# EAGLE board LPEM (EAGLE 5.06)
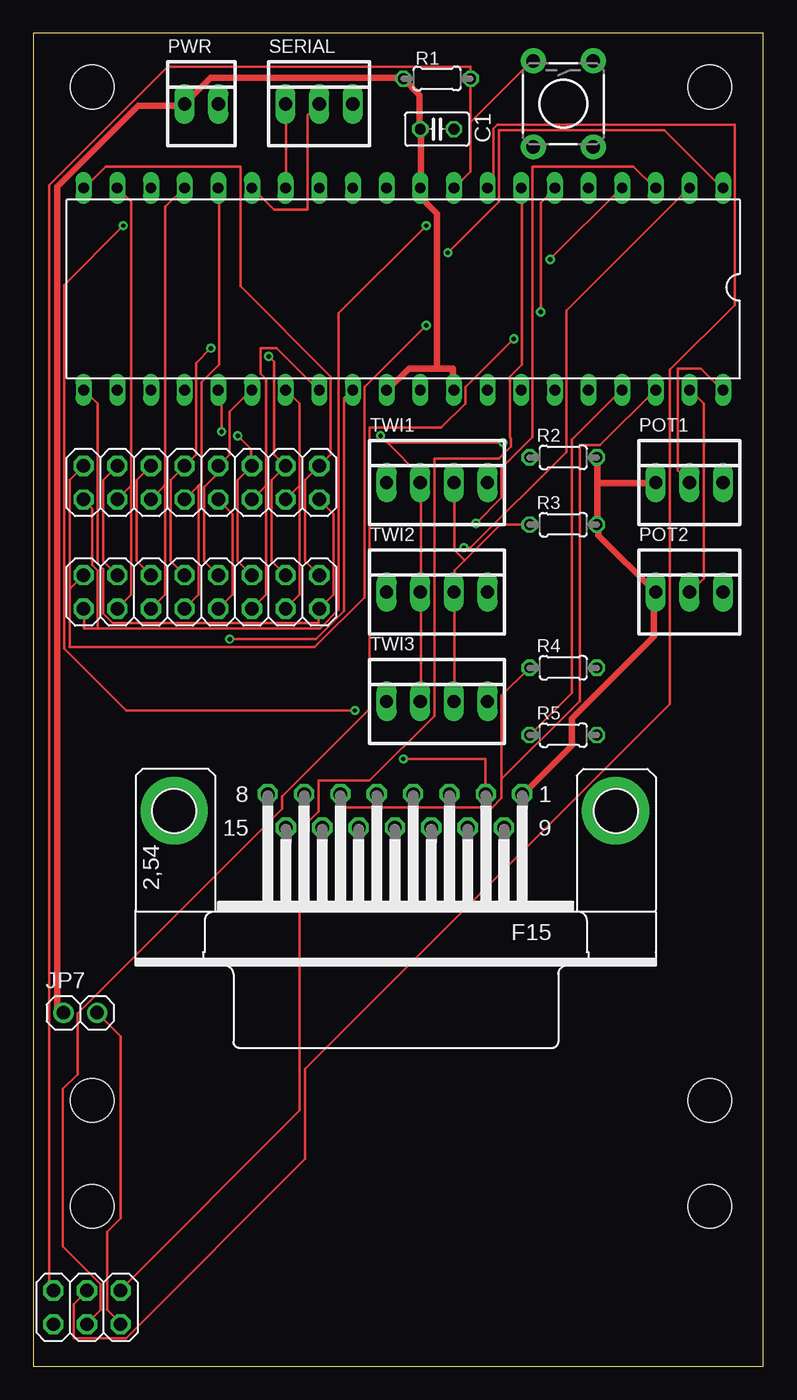
[diagram p0: board, top side]
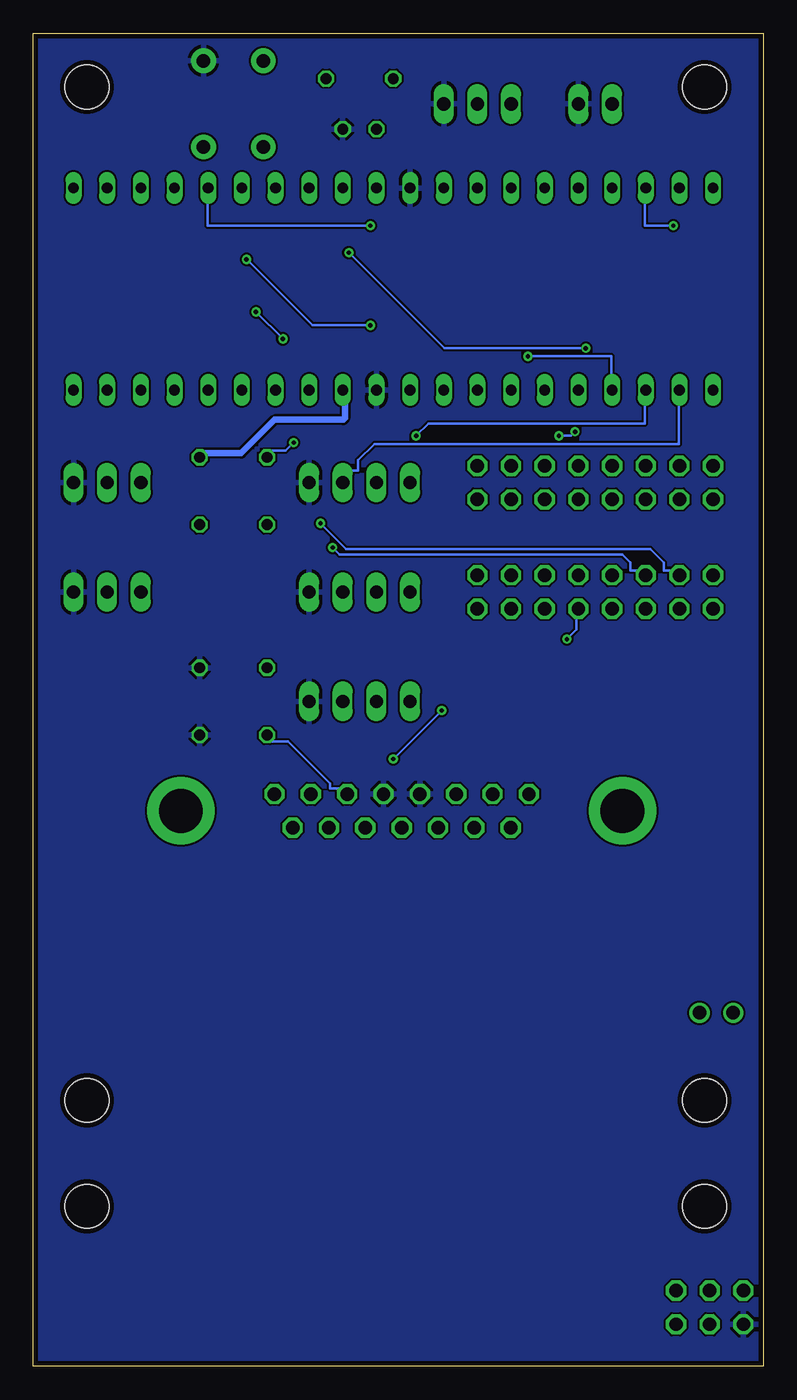
[diagram p1: board, bottom side, seen from below]

Size 55.12 x 100.58 mm. Coordinates in mm from the lower left corner, seen from the top.
Outline: 0,0 55.12,0 55.12,100.58 0,100.58 0,0
Copper layers (1*16): Top 0.0356mm / dielectric 1.5011mm / Bottom 0.0356mm
Design rules "DorkbotPDX *": minimum track width 6mil, minimum drill 13mil, track to track 6mil, track to pad 6mil, pad to pad 6mil, via to via 6mil, smd to smd 6mil, copper to edge 15mil, drill to drill 6mil, minimum pad ring 7mil, minimum via ring 7mil, stop-mask expansion 4mil, vias tented up to drill 0mil, thermal gap 10mil
Net classes: 0 default: width 0.178 mm; 1 pwr: width 0.508 mm
tRestrict: area -1.3,98 to 6.3,101.9; area -1,94.2 to 2.3,98

## Footprints (pad centres in the part's own frame; a part is rotated, then mirrored left to right if it is on the bottom)
C025-025X050 = drill 0.813 octagon: 1 -1.27,0; 2 1.27,0
DIL40 = drill 0.813 long: 1 -24.13,-7.62; 2 -21.59,-7.62; 3 -19.05,-7.62; 4 -16.51,-7.62; 5 -13.97,-7.62; 6 -11.43,-7.62; 7 -8.89,-7.62; 8 -6.35,-7.62; 9 -3.81,-7.62; 10 -1.27,-7.62; 11 1.27,-7.62; 12 3.81,-7.62; 13 6.35,-7.62; 14 8.89,-7.62; 15 11.43,-7.62; 16 13.97,-7.62; 17 16.51,-7.62; 18 19.05,-7.62; 19 21.59,-7.62; 20 24.13,-7.62; 21 24.13,7.62; 22 21.59,7.62; 23 19.05,7.62; 24 16.51,7.62; 25 13.97,7.62; 26 11.43,7.62; 27 8.89,7.62; 28 6.35,7.62; 29 3.81,7.62; 30 1.27,7.62; 31 -1.27,7.62; 32 -3.81,7.62; 33 -6.35,7.62; 34 -8.89,7.62; 35 -11.43,7.62; 36 -13.97,7.62; 37 -16.51,7.62; 38 -19.05,7.62; 39 -21.59,7.62; 40 -24.13,7.62
STAND-OFF = hole 3.302: 0,0
2X08 = drill 1.016 octagon: 1 -8.89,-1.27; 2 -8.89,1.27; 3 -6.35,-1.27; 4 -6.35,1.27; 5 -3.81,-1.27; 6 -3.81,1.27; 7 -1.27,-1.27; 8 -1.27,1.27; 9 1.27,-1.27; 10 1.27,1.27; 11 3.81,-1.27; 12 3.81,1.27; 13 6.35,-1.27; 14 6.35,1.27; 15 8.89,-1.27; 16 8.89,1.27
1X02 = drill 1.016 round: 1 -1.27,0; 2 1.27,0
2X03 = drill 1.016 octagon: 1 -2.54,-1.27; 2 -2.54,1.27; 3 0,-1.27; 4 0,1.27; 5 2.54,-1.27; 6 2.54,1.27
22-23-2031 = drill 1 long: 1 -2.54,0; 2 0,0; 3 2.54,0
22-23-2021 = drill 1 long: 1 -1.27,0; 2 1.27,0
0204/5 = drill 0.813 octagon: 1 -2.54,0; 2 2.54,0
TACTILE-PTH = drill 1.016 pad 1.88 round: 1 -3.251,2.261; 2 3.251,2.261; 3 -3.251,-2.261; 4 3.251,-2.261
22-23-2041 = drill 1 long: 1 -3.81,0; 2 -1.27,0; 3 1.27,0; 4 3.81,0
F15HP = drill 1.016 octagon: 1 -9.601,-1.27; 2 -6.858,-1.27; 3 -4.115,-1.27; 4 -1.372,-1.27; 5 1.372,-1.27; 6 4.115,-1.27; 7 6.858,-1.27; 8 9.601,-1.27; 9 -8.23,1.27; 10 -5.486,1.27; 11 -2.743,1.27; 12 0,1.27; 13 2.743,1.27; 14 5.486,1.27; 15 8.23,1.27 | drill 3.302 pad 5.08 round: G1 -16.662,0; G2 16.662,0

## Placement (x,y rotation side)
C1  [C025-025X050]  30.48,93.34 0 top
IC1  [DIL40]  27.94,81.28 180 top
JP1  STAND-OFF  [STAND-OFF]  4.45,96.52 0 top
JP2  STAND-OFF  [STAND-OFF]  51.05,96.52 0 top
JP3  EPB1  [2X08]  12.7,66.67 180 top
JP4  EPB2  [2X08]  12.7,58.42 180 top
JP5  STAND-OFF  [STAND-OFF]  4.45,20.07 0 top
JP6  STAND-OFF  [STAND-OFF]  51.05,20.07 0 top
JP7  PWRSEL  [1X02]  3.56,26.67 0 top
JP8  STAND-OFF  [STAND-OFF]  4.45,12.07 0 top
JP9  STAND-OFF  [STAND-OFF]  51.05,12.07 0 top
JP10  PROG  [2X03]  4.06,4.45 180 top
POT1  22-23-2031  [22-23-2031]  49.53,66.67 0 top
POT2  22-23-2031  [22-23-2031]  49.53,58.42 0 top
PWR  22-23-2021  [22-23-2021]  12.7,95.25 0 top
R1  47k  [0204/5]  30.48,97.16 180 top
R2  2k  [0204/5]  40.01,68.58 0 top
R3  2k  [0204/5]  40.01,63.5 0 top
R4  37k  [0204/5]  40.01,52.7 0 top
R5  37k  [0204/5]  40.01,47.62 0 top
S1  RESET  [TACTILE-PTH]  40.01,95.25 270 top
SERIAL  22-23-2031  [22-23-2031]  21.59,95.25 0 top
TWI1  22-23-2041  [22-23-2041]  30.48,66.67 0 top
TWI2  22-23-2041  [22-23-2041]  30.48,58.42 0 top
TWI3  22-23-2041  [22-23-2041]  30.48,50.16 0 top
X1  [F15HP]  27.3,41.91 180 top

## Library data of the parts
C1 R1-R5 = rcl
IC1 = 1284p
JP1 JP2 JP5 JP6 JP8 JP9 S1 = SparkFun
JP3 JP4 JP7 JP10 = pinhead
POT1 POT2 PWR SERIAL TWI1-TWI3 = con-molex
X1 = con-subd

## Nets
BOARDSEL0: IC1.24 JP3.3 JP4.3
BOARDSEL1: IC1.25 JP3.5 JP4.5
BOARDSEL2: IC1.26 JP3.7 JP4.7
DATA: IC1.20 JP3.1 JP4.1
DIGSEL0: IC1.16 JP3.10 JP4.10
DIGSEL1: IC1.17 JP3.12 JP4.12
DIGSEL2: IC1.19 JP3.14 JP4.14
GND: C1.2 IC1.11 IC1.31 JP10.6 POT1.3 POT2.3 PWR.2 R4.2 R5.2 S1.1 SERIAL.3 TWI1.4 TWI2.4 TWI3.4 X1.4 X1.5
INPUT0: IC1.1 JP3.9 JP4.9
INPUT1: IC1.2 JP3.11 JP4.11
INPUT2: IC1.3 JP3.13 JP4.13
INPUT3: IC1.4 JP3.15 JP4.15
JOYTRIG: IC1.18 X1.2
MISO: IC1.7 JP10.1
MOSI: IC1.6 JP10.4
N$1: IC1.40 POT1.2
N$2: IC1.39 POT2.2
N$3: IC1.37 R5.1 X1.3
N$4: JP7.2 JP10.2
N$6: IC1.38 R4.1 X1.6
RESET: IC1.9 JP10.5 R1.1 S1.3
RX: IC1.14 SERIAL.1
SCK: IC1.8 JP10.3
SCL: IC1.22 R3.1 TWI1.3 TWI2.3 TWI3.3
SDA: IC1.23 R2.1 TWI1.2 TWI2.2 TWI3.2
SEGSEL0: IC1.27 JP3.4 JP4.4
SEGSEL1: IC1.28 JP3.6 JP4.6
SEGSEL2: IC1.29 JP3.8 JP4.8
SPARE: IC1.5 JP3.16 JP4.16
STROBE: IC1.21 JP3.2 JP4.2
TX: IC1.15 SERIAL.2
VCC [pwr]: C1.1 IC1.10 IC1.30 IC1.32 JP7.1 POT1.1 POT2.1 PWR.1 R1.2 R2.2 R3.2 X1.1

## Tracks (layer width: path | path; a pad name or v marks a point on that pad's centre or on a via)
BOARDSEL0  (via drill 0.33)
  Top 0.178: v17.78,76.2 18.19,75.79 18.19,68.78 19,67.97 JP3.3 19,67.87 17.98,66.85 17.98,60.76 19,59.74 JP4.3
  Bottom 0.178: v17.78,76.2 11.48,76.2 11.48,73.66 IC1.24
BOARDSEL1  (via drill 0.33)
  Top 0.178: v14.22,70.51 14.22,73.46 14.02,73.66 IC1.25 | v15.44,70.21 16.46,69.19 16.46,67.97 JP3.5 16.46,67.87 15.44,66.85 15.44,60.76 16.46,59.74 JP4.5
  Bottom 0.178: v14.22,70.51 14.53,70.21 v15.44,70.21
BOARDSEL2
  Top 0.178: IC1.26 16.46,73.66 14.83,72.03 14.83,68.78 14.02,67.97 JP3.7 13.92,67.87 13.92,67.36 12.9,66.34 12.9,60.76 13.92,59.74 JP4.7
DATA
  Top 0.178: IC1.20 3.86,88.9 5.49,90.53 15.65,90.53 15.65,81.48 22.45,74.68 22.45,68.78 21.64,67.97 JP3.1 21.54,67.87 20.52,66.85 20.52,60.76 21.54,59.74 JP4.1
DIGSEL0
  Top 0.178: 12.45,66.4 11.48,65.43 JP3.10 | 12.45,66.4 12.7,66.65 12.7,74.27 14.02,75.59 14.02,88.9 IC1.16 | JP4.10 11.48,57.2 12.5,58.22 12.5,66.34 12.45,66.4
DIGSEL1
  Top 0.178: 9.91,66.4 8.94,65.43 JP3.12 | 9.91,66.4 9.96,66.45 9.96,87.48 11.38,88.9 IC1.17 | JP4.12 8.94,57.2 9.96,58.22 9.96,66.34 9.91,66.4
DIGSEL2
  Top 0.178: 7.37,66.4 6.4,65.43 JP3.14 | 7.37,66.4 7.42,66.45 7.42,87.88 6.4,88.9 IC1.19 | JP4.14 6.4,57.2 7.42,58.22 7.42,66.34 7.37,66.4
GND
  pour Bottom: 0,101.6 55.88,101.6 55.88,-1.27 0,-1.27
INPUT0  (via drill 0.33)
  Top 0.178: v31.29,84.02 35.15,87.88 35.15,93.27 47.65,93.27 52.02,88.9 IC1.1 | v13.41,76.81 12.29,75.69 12.29,68.78 11.48,67.97 JP3.9 11.38,67.87 10.36,66.85 10.36,60.76 11.38,59.74 JP4.9
  Bottom 0.178: v31.29,84.02 24.08,76.81 v13.41,76.81
INPUT1  (via drill 0.33)
  Top 0.178: v32.51,61.77 33.02,61.77 40.23,68.99 40.23,79.65 49.48,88.9 IC1.2 | JP3.11 8.84,67.87 7.82,66.85 7.82,60.76 8.84,59.74 JP4.11
  Bottom 0.178: v32.51,61.77 32,61.27 10.67,61.27 10.06,60.65 10.06,60.05 9.25,60.05 8.94,59.74 JP4.11
INPUT2  (via drill 0.33)
  Top 0.178: v33.43,63.6 35.36,65.53 35.36,67.77 37.69,70.1 37.69,90.53 45.31,90.53 46.94,88.9 IC1.3 | JP3.13 6.3,67.87 5.28,66.85 5.28,60.76 6.3,59.74 JP4.13
  Bottom 0.178: v33.43,63.6 31.5,61.67 8.53,61.67 7.52,60.65 7.52,60.05 6.71,60.05 6.4,59.74 JP4.13
INPUT3  (via drill 0.33)
  Top 0.178: v39.01,83.52 44.4,88.9 IC1.4 | v29.67,78.54 24.99,73.86 24.99,58.01 21.23,54.25 2.74,54.25 2.74,58.62 2.79,58.67 | 2.79,58.67 3.76,59.64 JP4.15 | JP3.15 3.76,67.87 2.74,66.85 2.74,58.72 2.79,58.67
  Bottom 0.178: v39.01,83.52 34.04,78.54 v29.67,78.54
JOYTRIG  (via drill 0.33)
  Top 0.178: v6.81,86.06 2.34,81.59 2.34,54.15 7.01,49.48 v24.28,49.48 | v27.94,45.82 34.14,45.82 34.14,43.18 X1.2
  Bottom 0.178: v6.81,86.06 8.94,86.06 8.94,88.9 IC1.18 | v24.28,49.48 v27.94,45.82
MISO
  Top 0.178: IC1.7 36.88,88.9 36.88,75.59 35.97,74.68 35.97,70.1 36.07,70 36.07,69.39 35.15,68.48 30.28,68.48 30.28,49.07 25.4,44.2 21.54,44.2 21.54,41.86 20.12,40.44 20.12,19.3 6.6,5.79 JP10.1
MOSI  (via drill 0.33)
  Top 0.178: v38.3,79.55 38.3,87.78 39.42,88.9 IC1.6 | v36.27,77.52 32.61,73.86 32.61,72.64 30.79,70.81 25.4,70.81 25.4,49.58 18.8,42.98 18.8,42.06 3.35,26.62 3.35,22.05 2.23,20.93 2.23,9.04 5.08,6.2 5.08,4.27 4.06,3.25 JP10.4
  Bottom 0.178: v36.27,77.52 v38.3,79.55
N$1
  Top 0.178: IC1.40 52.02,73.66 50.39,75.29 48.67,75.29 48.67,67.56 49.48,66.75 POT1.2
N$2
  Top 0.178: IC1.39 49.58,73.66 50.6,72.64 50.6,59.44 49.58,58.42 POT2.2
N$3
  Top 0.178: IC1.37 44.4,73.66 40.64,69.9 40.64,50.8 37.49,47.65 R5.1
  Bottom 0.178: R5.1 37.39,47.55 37.39,47.14 35.87,47.14 32.72,43.99 32.72,43.59 31.9,43.59 31.5,43.18 X1.3
N$4
  Top 0.178: JP10.2 6.6,3.25 5.59,4.27 5.59,10.16 6.6,11.18 6.6,24.89 4.88,26.62 JP7.2
N$6
  Top 0.178: 35.36,44.3 35.36,42.88 34.65,42.16 23.27,42.16 23.27,43.18 X1.6 | 35.36,44.3 35.36,50.6 37.39,52.63 R4.1 | 35.36,44.3 41.25,50.19 41.25,69.49 42.77,69.49 46.94,73.66 IC1.38
RESET
  Top 0.178: 33.02,93.88 33.02,90.12 31.8,88.9 IC1.9 | 33.02,93.88 33.02,97.13 R1.1 33.02,97.23 33.02,98.04 10.16,98.04 1.22,89.1 1.22,6.1 1.52,5.79 JP10.5 | 33.02,93.88 37.69,98.55 S1.3
RX
  Top 0.178: IC1.14 19.1,88.9 19.1,95.2 SERIAL.1
SCK
  Top 0.178: IC1.8 34.34,88.9 34.75,89.31 34.75,93.37 35.05,93.68 52.93,93.68 52.93,80.06 48.06,75.18 48.06,49.99 20.52,22.45 20.52,15.65 7.01,2.13 3.05,2.13 3.05,4.67 4.06,5.69 JP10.3
SCL
  Top 0.178: 32.56,60.81 31.8,60.05 31.8,58.42 | 32.56,60.81 35.26,63.5 37.39,63.5 R3.1 | 31.8,58.42 TWI2.3 31.8,58.42 | 31.8,58.42 31.8,50.19 TWI3.3 | 32.56,60.81 32.51,60.86 31.8,61.57 31.8,66.65 TWI1.3
  Bottom 0.178: IC1.22 6.4,73.66 6.4,69.6 29.36,69.6 30.58,68.38 30.58,67.56 31.09,67.56 31.7,66.95 31.7,66.75 TWI1.3
SDA  (via drill 0.33)
  Top 0.178: 29.26,58.42 29.26,50.19 TWI3.2 | 29.26,58.42 TWI2.2 29.26,58.42 | 26.77,69.65 29.16,67.26 29.16,66.75 TWI1.2 29.26,66.65 29.26,58.42 | 26.77,69.65 v26.21,70.21 | v35.46,69.7 26.82,69.7 26.77,69.65
  Bottom 0.178: v26.21,70.21 25.3,71.12 8.94,71.12 8.94,73.66 IC1.23 | v35.46,69.7 36.07,69.09 37.39,69.09 37.39,68.58 R2.1
SEGSEL0
  Top 0.178: 20.07,66.4 19.1,65.43 JP3.4 | 20.07,66.4 20.12,66.45 20.12,72.64 19.1,73.66 IC1.27 | JP4.4 19.1,57.2 20.12,58.22 20.12,66.34 20.07,66.4
SEGSEL1
  Top 0.178: 17.53,66.4 16.56,65.43 JP3.6 | 17.53,66.4 17.58,66.45 17.58,74.47 17.17,74.88 17.17,76.81 18.39,76.81 21.54,73.66 IC1.28 | JP4.6 16.56,57.2 17.58,58.22 17.58,66.34 17.53,66.4
SEGSEL2  (via drill 0.33)
  Top 0.178: v14.83,54.86 21.34,54.86 23.47,57 23.47,73.05 24.08,73.66 IC1.29 | JP3.8 14.02,65.33 15.04,64.31 15.04,58.22 14.02,57.2 JP4.8
  Bottom 0.178: v14.83,54.86 14.12,55.57 14.12,57.1 14.02,57.1 JP4.8
SPARE  (via drill 0.33)
  Top 0.178: v29.67,86.06 23.06,79.45 23.06,57.1 21.64,55.68 4.88,55.68 | 4.88,55.68 3.86,55.68 3.86,57.1 JP4.16 | 4.88,55.68 4.88,60.05 4.47,60.45 4.47,64.72 3.86,65.33 JP3.16
  Bottom 0.178: v29.67,86.06 41.96,86.06 41.96,88.9 IC1.5
STROBE
  Top 0.178: IC1.21 3.86,73.66 4.88,72.64 4.88,60.55 5.28,60.15 5.28,56.79 5.99,56.08 21.54,56.08 21.54,57.1 JP4.2 21.64,57.2 22.66,58.22 22.66,64.31 21.64,65.33 JP3.2
TX
  Top 0.178: IC1.15 16.56,88.9 18.19,87.27 20.73,87.27 20.73,94.39 21.54,95.2 SERIAL.2
VCC
  Top 0.508: 42.57,66.65 42.57,68.58 R2.2 | 42.57,66.65 42.57,63.5 R3.2 42.67,63.3 42.67,62.69 46.94,58.42 POT2.1 46.84,58.22 46.84,55.07 40.64,48.87 40.64,46.84 36.98,43.18 X1.1 | POT1.1 46.94,66.65 42.77,66.65 42.57,66.65 | 30.48,75.29 31.7,75.29 31.7,73.66 IC1.32 | 30.48,75.29 28.35,75.29 26.72,73.66 IC1.30 | JP7.1 2.23,26.72 1.83,27.13 1.83,89 7.92,95.1 11.28,95.1 PWR.1 11.48,95.3 13.41,97.23 27.74,97.23 R1.2 27.94,97.13 29.16,95.91 29.16,93.57 C1.1 29.26,93.27 29.26,88.9 IC1.10 29.36,88.7 29.36,88.09 30.48,86.97 30.48,75.49 30.48,75.29
  Bottom 0.508: R2.2 42.47,68.58 42.47,68.89 39.42,68.89 36.88,71.42 31.7,71.42 31.6,71.53 31.6,73.66 31.7,73.66 IC1.32

## Text on the board
tDocu: RESET | 5V | GND | RX | TX | GND | 1 | LPEM v1.0 -- February 2011 | EXPERIMENTAL AVIONICS | Not approved for flight | beyond termination shock | 1